# Altium PCB FPGA_Interface_BRD.PcbDoc (part 1 of 2)
Units mm, origin at the board's own origin, x right, y up, seen from the top; angles counter-clockwise.
Board outline 100 x 93 mm, 4 copper layers (L1, L2, L3, L4), stack 1.57 mm thick; 92 components, 85 nets, 379 pads, 103 vias.
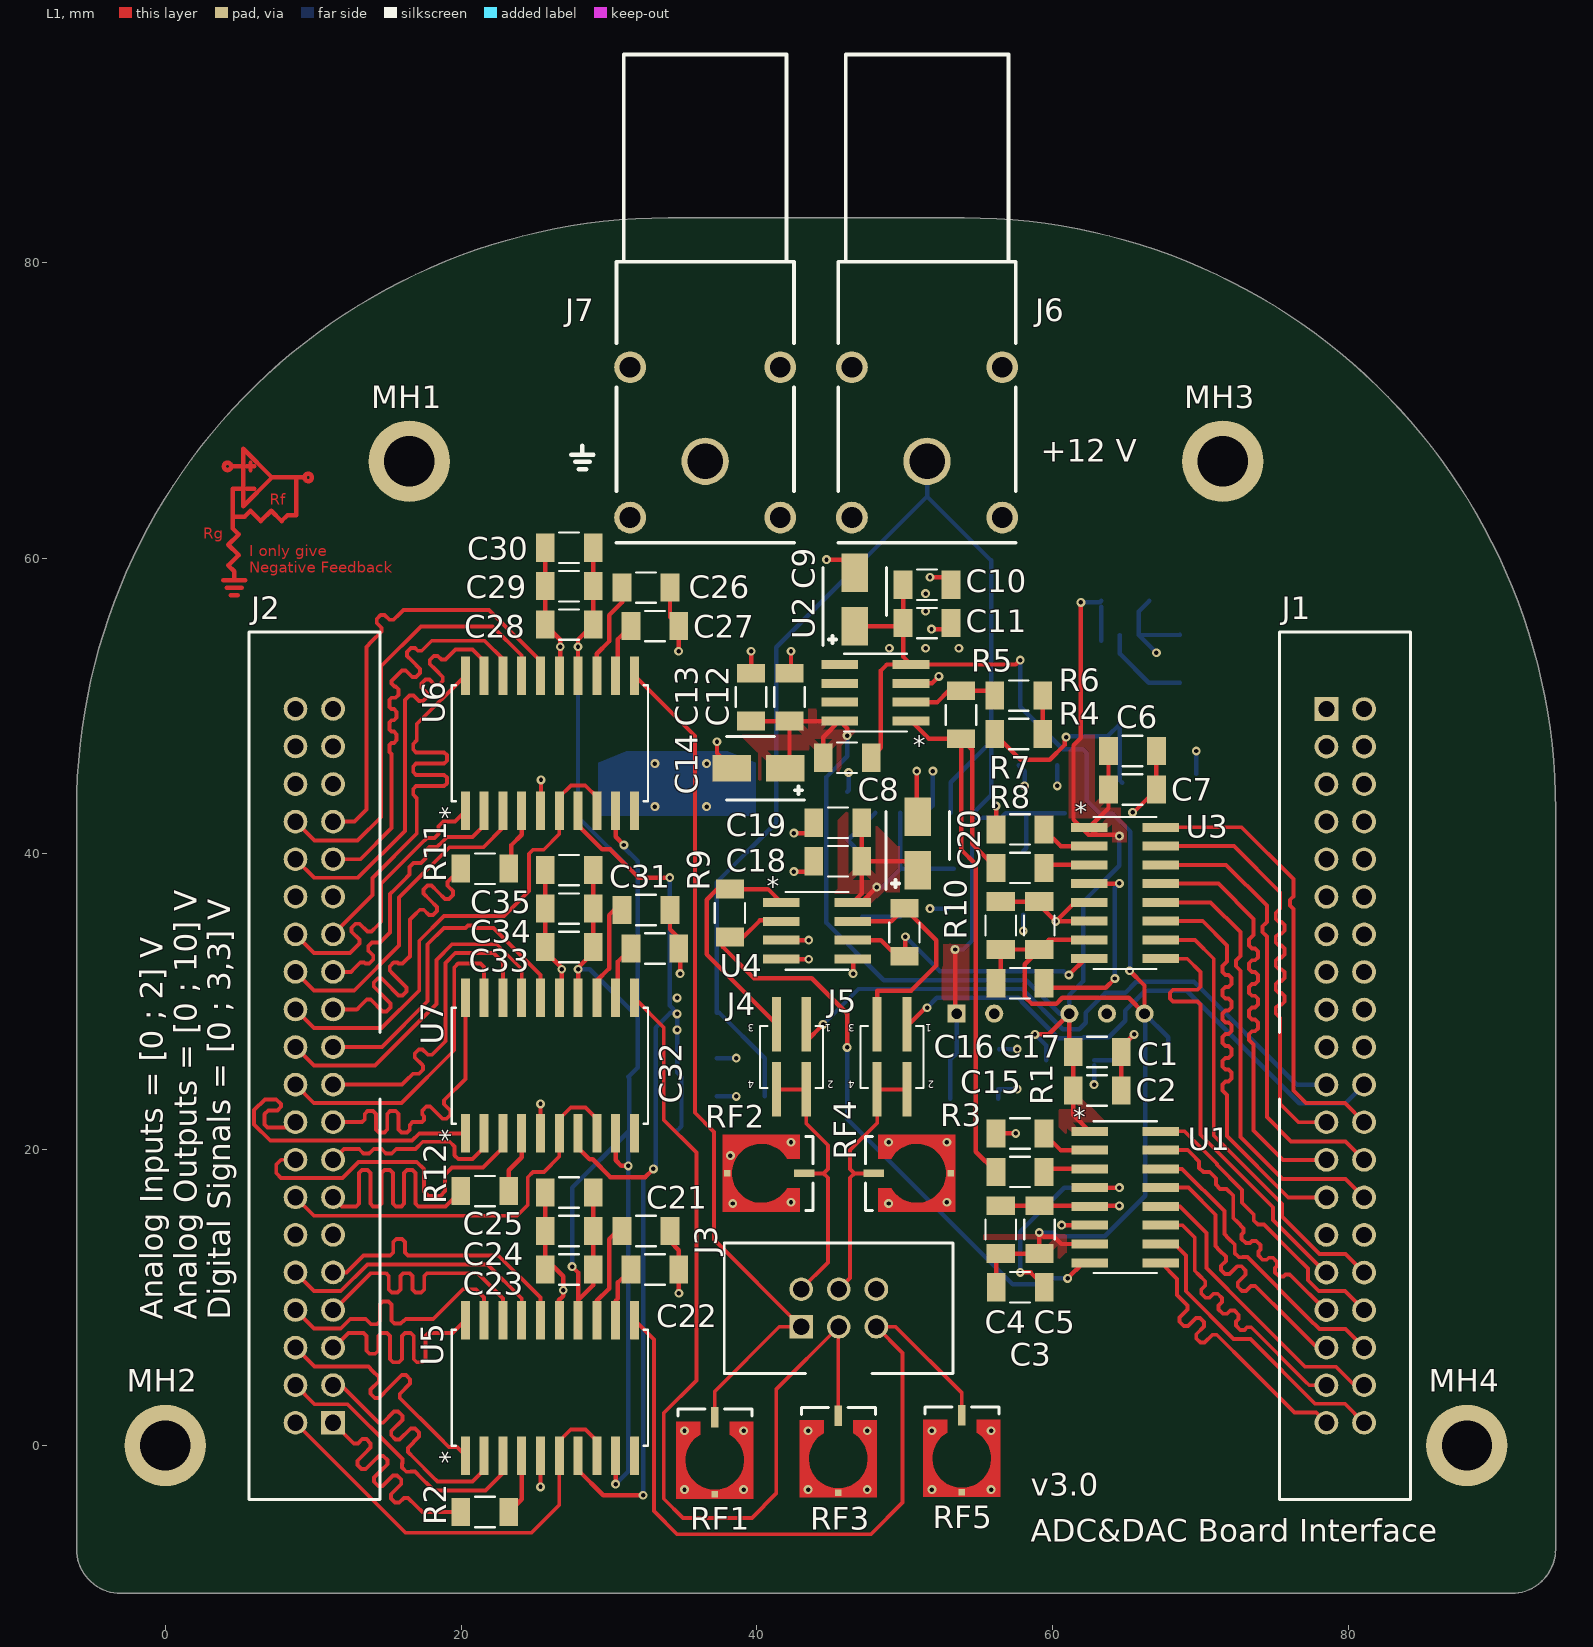
[diagram p0: L1 view]
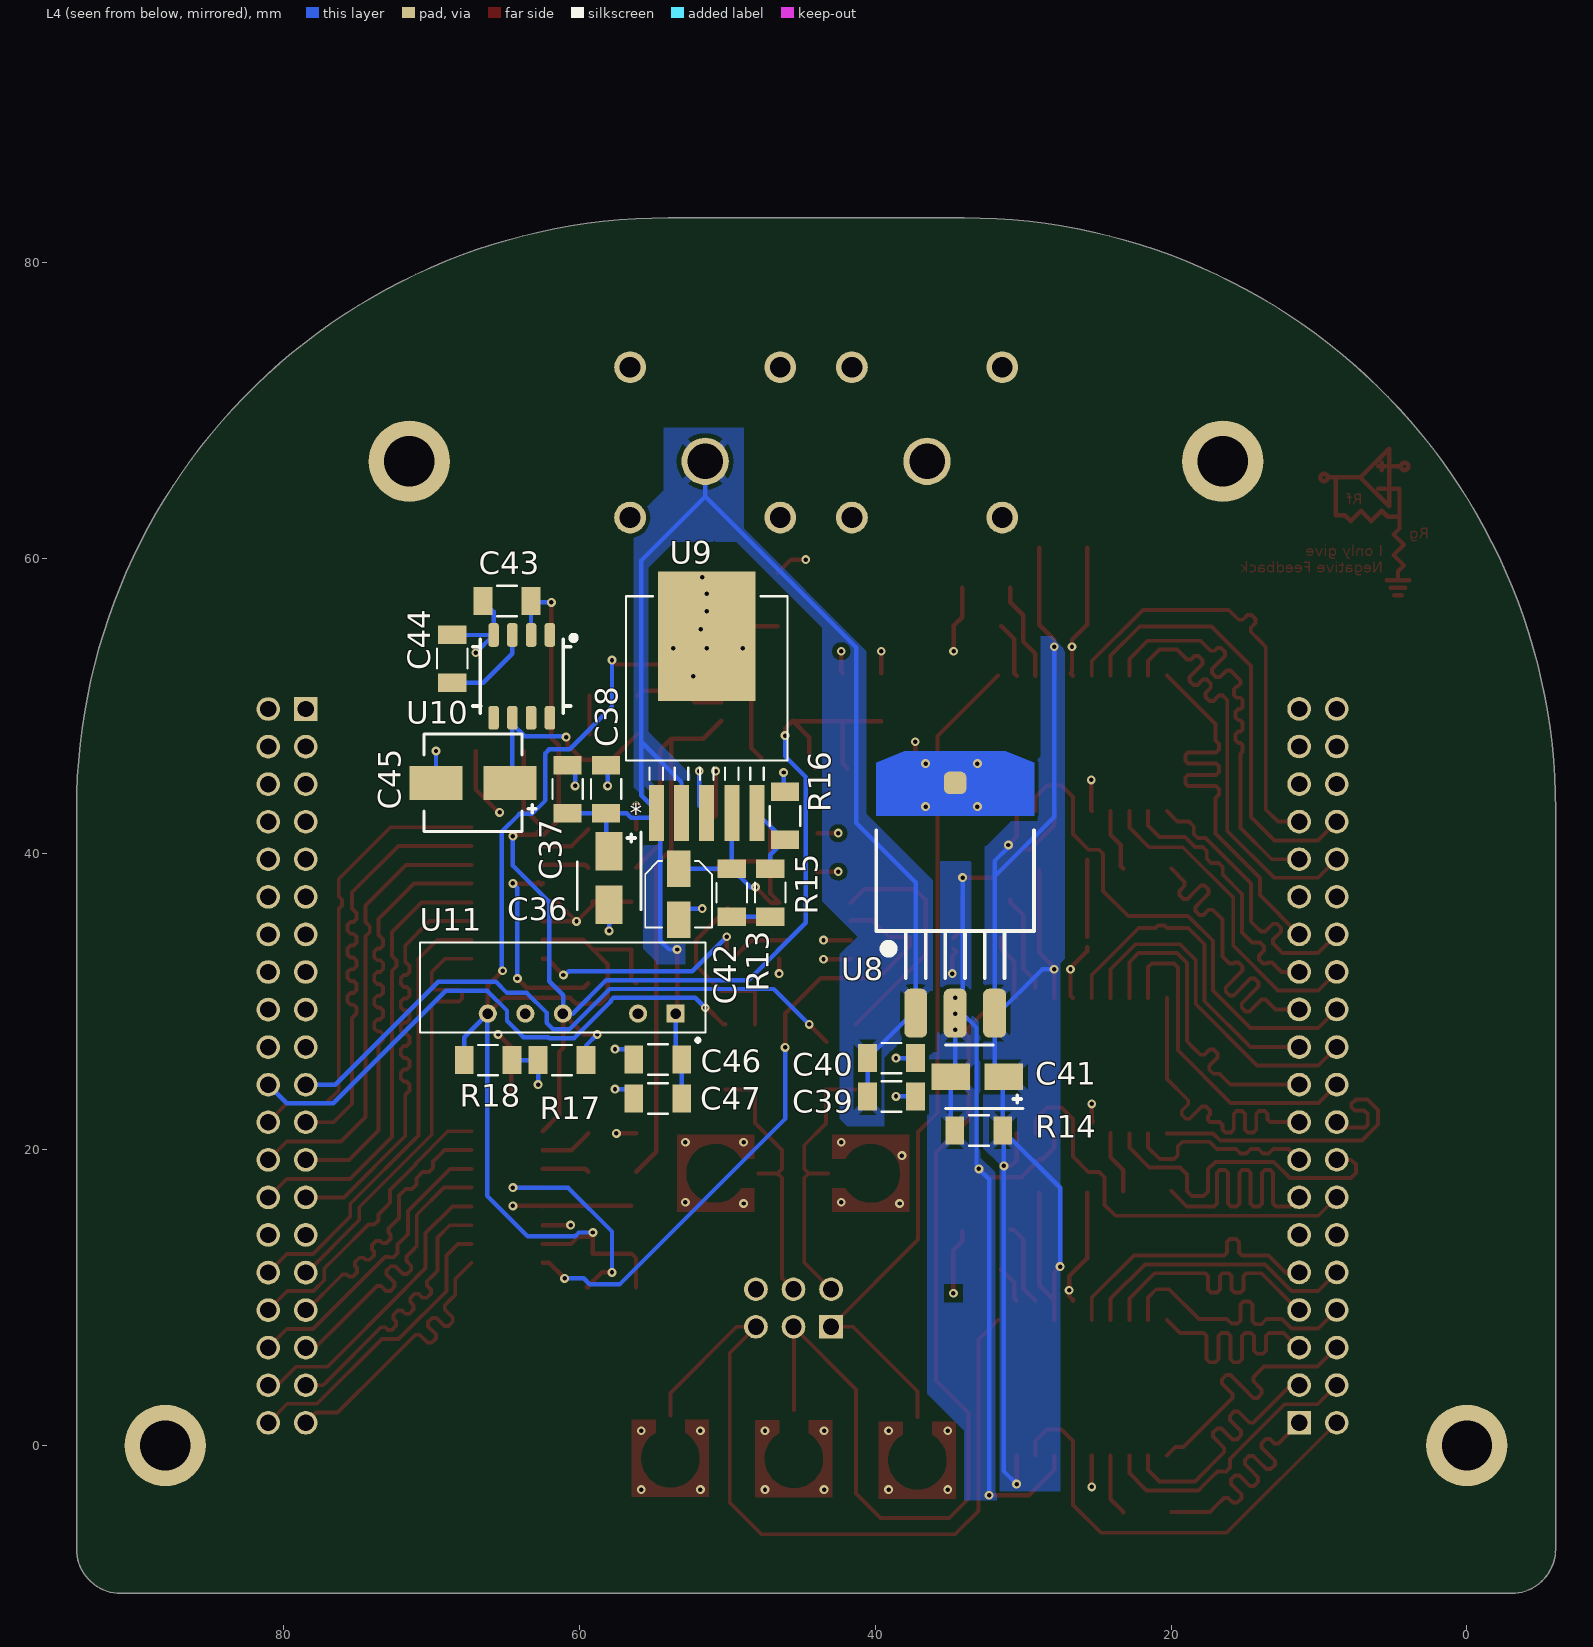
[diagram p1: L4 view, seen from below]
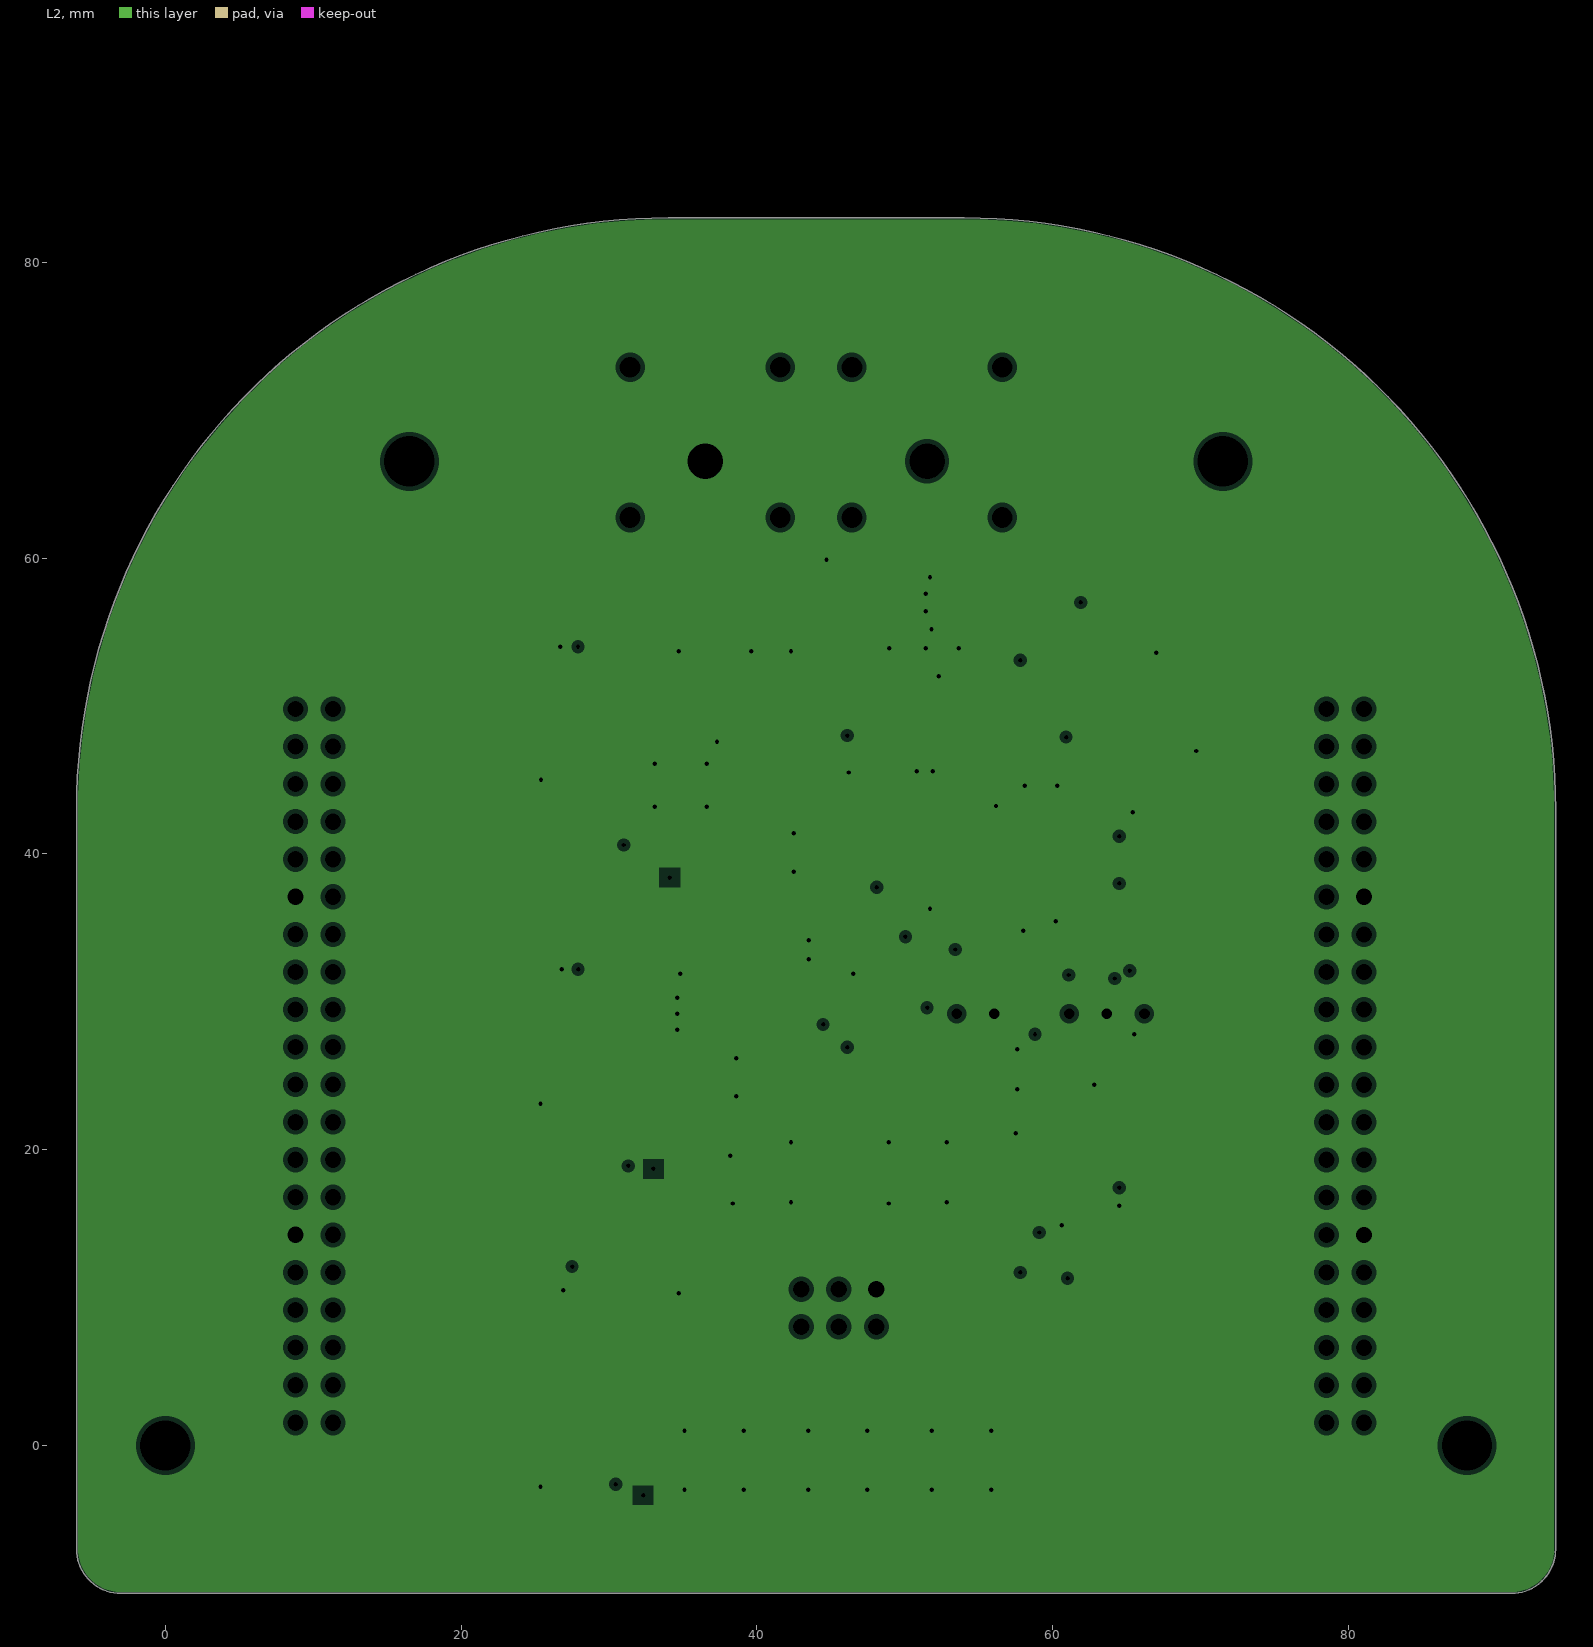
[diagram p2: L2, clearances drawn from the general rule]
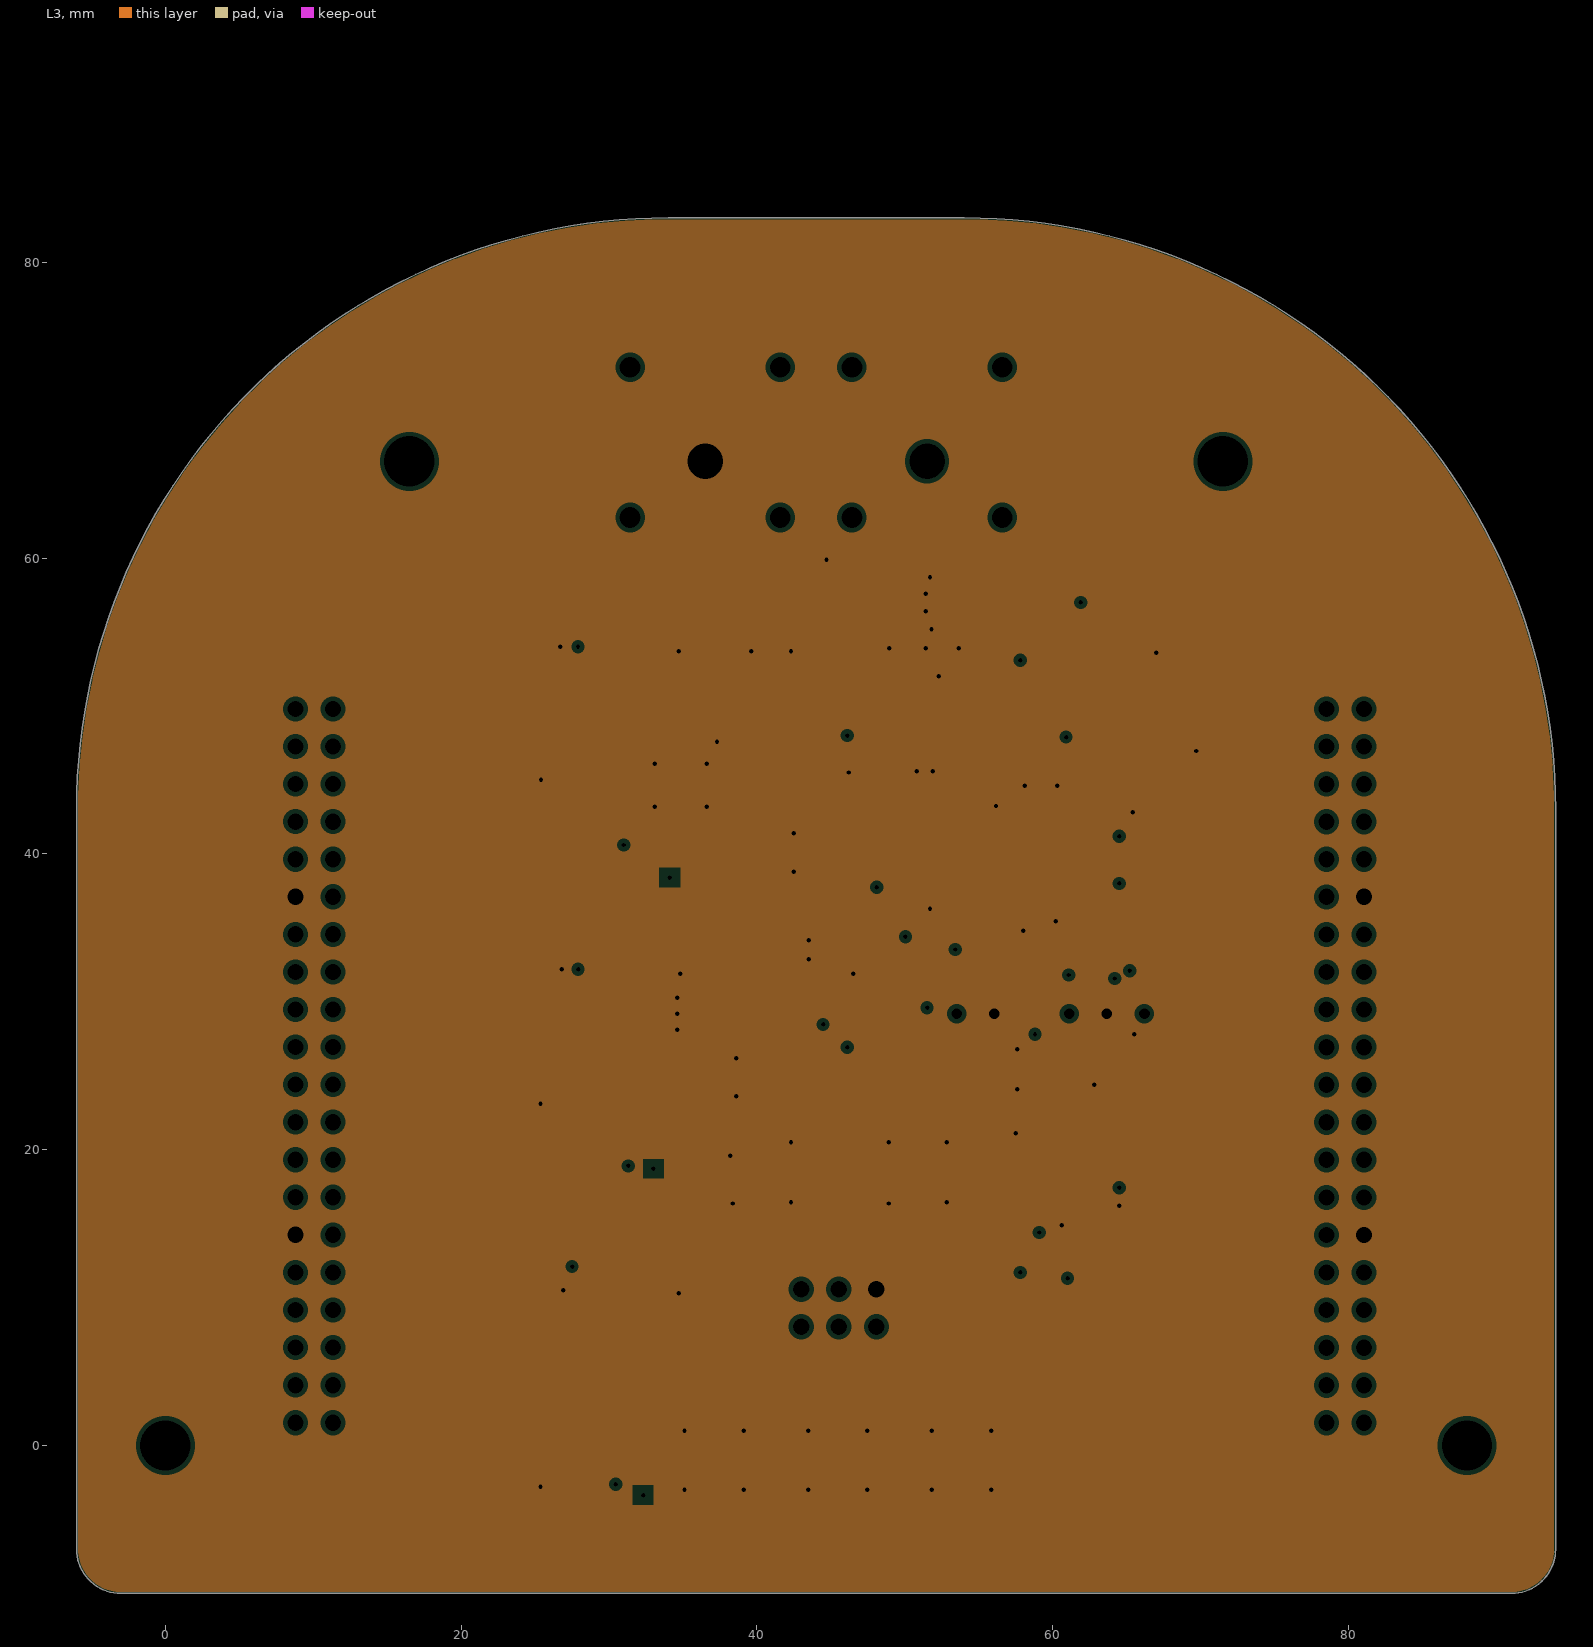
[diagram p3: L3, clearances drawn from the general rule]

## Layer stack, top to bottom
Top Solder: solder mask 0.015, Solder Resist, Dk 3.8
L1: signal copper 0.035
D1: prepreg 0.2, 7628, Dk 4.6
L2: plane copper 0.0175, net GND
D2: core 1.065, FR-4, Dk 4.5
L3: plane copper 0.0175, net GND
D3: prepreg 0.2, 7628, Dk 4.6
L4: signal copper 0.035
Bottom Solder: solder mask 0.015, Solder Resist, Dk 3.8

## Board outline
-6,-7 ccw(c-3,-7) -3,-10 91,-10 ccw(c91,-7) 94,-7 94,43 ccw(c54,43) 54,83 34,83 ccw(c34,43) -6,43
cut-out: -21,3

## Design rules (kind name [scope] priority, off if disabled: settings)
BoardOutlineClearance [All] p1: gap=0.4 ignorepadtopadclearanceinfootprint=FALSE
Clearance [All] p1: gap=0.3 ignorepadtopadclearanceinfootprint=FALSE
DiffPairsRouting [All] p1: maxlimit=0.6 minlimit=0.3 mostfreqgap=0.3 toplayer_minwidth=0.3 toplayer_maxwidth=1 toplayer_prefwidth=0.5 bottomlayer_minwidth=0.3 bottomlayer_maxwidth=1 bottomlayer_prefwidth=0.5 maxuncoupledlength=12.7
HoleSize [All] p1: absolutevalues=TRUE maxlimit=6 minlimit=0.3 maxpercent=80.000 minpercent=20.000
HoleToHoleClearance [All] p1: gap=0.2 allowstackedmicrovias=TRUE
MatchedLengths [InNetClass('ADC(1)') AND InNetClass('ADC(2)') AND InNetClass('ADC(3)') AND InNetClass('DAC(1)') AND InNetClass('DAC(2)')] p1: tolerance=0.254 checknetsindiffpair=FALSE checkdiffpairvsdiffpair=TRUE checkxsignals=TRUE checkothers=TRUE
MinimumAnnularRing [All] p1: minimumring=0.1
MinimumSolderMaskSliver [All] p1: minsoldermaskwidth=0.2
ParallelSegment [All] p1: limit=254 gap=0.3
PlaneClearance [All] p1: clearance=0.3
PlaneConnect [All] p1: pad.planeconnectstyle=Relief pad.reliefexpansion=0.5 pad.reliefentries=4 pad.reliefconductorwidth=0.5 pad.reliefairgap=0.3 via.planeconnectstyle=Direct via.reliefexpansion=0.508 via.reliefentries=4 via.reliefconductorwidth=1 via.reliefairgap=0.254
PolygonConnect [All] p1: thpad.connectstyle=Relief thpad.reliefconductorwidth=0.5 thpad.reliefentries=4 thpad.polygonreliefangle="45 Angle" thpad.airgapwidth=0.3 smdpad.connectstyle=Relief smdpad.reliefconductorwidth=0.5 smdpad.reliefentries=4 smdpad.polygonreliefangle="45 Angle" smdpad.airgapwidth=0.3 via.connectstyle=Direct via.reliefconductorwidth=0.5 via.reliefentries=4 via.polygonreliefangle="45 Angle" via.airgapwidth=0.3
RoutingVias [All] p1: holewidth=0.3 width=0.6 viastyle="Through Hole" minholewidth=0.3 minwidth=0.6 maxholewidth=0.3 maxwidth=0.6
SilkToSilkClearance [All] p1: silktosilkclearance=0.2
SilkToSolderMaskClearance [IsPad] p1: minsilkscreentomaskgap=0.2 clearancetoexposedcopper=TRUE
SolderMaskExpansion [All] p1: expansion=0.102
Width Zo [InNetClass('ADC(1)') OR InNetClass('ADC(2)') OR InNetClass('ADC(3)') OR InNetClass('DAC(1)') OR InNetClass('DAC(2)') OR InNet('Vo (A1)') OR InNet('Vo (A2)') OR InNet('Vin(ADC-1)') OR InNet('Vin(ADC-2)') OR InNet('Vin(ADC-3)')] p1: maxlimit=0.262 minlimit=0.262 preferedwidth=0.262 impedancedriven=TRUE minimp=50.000000 maximp=50.000000 favimp=50.000000
Width [All] p2: maxlimit=1.5 minlimit=0.2 preferedwidth=0.3
22 further rules are at their usual default settings.

## Classes and differential pairs
component class "[07] - Power_Stage": C36 C37 C38 C39 C40 C41 C42 C43 C44 C45 C46 C47 J6 J7 R13 R14 R15 R16 R17 R18 U8 U9 U10 U11
component class "[06] - ADC": C21 C22 C23 C24 C25 C26 C27 C28 C29 C30 C31 C32 C33 C34 C35 R2 R11 R12 U5 U6 U7
component class "[05] - DAC": C1 C2 C3 C4 C5 C6 C7 C8 C9 C10 C11 C12 C13 C14 C15 C16 C17 C18 C19 C20 R1 R3 R4 R5 R6 R7 R8 R9 R10 U1 U2 U3 U4
component class "[04] - CONNECTORS_2": J4 J5
component class "[03] - CONNECTORS_1": J1 J2 J3 MH1 MH2 MH3 MH4 RF1 RF2 RF3 RF4 RF5
net class ADC(3): o_CONVST_ADC_3 o_DB0_ADC_3 o_DB1_ADC_3 o_DB2_ADC_3 o_DB3_ADC_3 o_DB4_ADC_3 o_DB5_ADC_3 o_DB6_ADC_3 o_DB7_ADC_3 o_EOC_ADC_3
net class DAC(2): o_DB1_DAC_2 o_DB2_DAC_2 o_DB3_DAC_2 o_DB4_DAC_2 o_DB5_DAC_2 o_DB6_DAC_2 o_DB7_DAC_2 o_DB8_DAC_2
net class DAC(1): o_DB1_DAC_1 o_DB2_DAC_1 o_DB3_DAC_1 o_DB4_DAC_1 o_DB5_DAC_1 o_DB6_DAC_1 o_DB7_DAC_1 o_DB8_DAC_1
net class ADC(2): o_CONVST_ADC_2 o_DB0_ADC_2 o_DB1_ADC_2 o_DB2_ADC_2 o_DB3_ADC_2 o_DB4_ADC_2 o_DB5_ADC_2 o_DB6_ADC_2 o_DB7_ADC_2 o_EOC_ADC_2
net class ADC(1): o_CONVST_ADC_1 o_DB0_ADC_1 o_DB1_ADC_1 o_DB2_ADC_1 o_DB3_ADC_1 o_DB4_ADC_1 o_DB5_ADC_1 o_DB6_ADC_1 o_DB7_ADC_1 o_EOC_ADC_1

## Components (designator, comment, footprint, x,y, rotation, side; value= is the part's Value field where it differs from the comment)
C1 "0,1 uF" "1206 [Métrica 3216]" 63,26.6 r0 top
C2 "470 pF" "1206 [Métrica 3216]" 63,24 r0 top
C3 "0,01 uF" "1206 [Métrica 3216]" 57.8,10.7 r180 top
C4 "0,1 uF" "1206 [Métrica 3216]" 56.488,14.6 r90 top
C5 "470 pF" "1206 [Métrica 3216]" 59.1,14.6 r90 top
C6 "0,1 uF" "1206 [Métrica 3216]" 65.388,46.955 r0 top
C7 "470 pF" "1206 [Métrica 3216]" 65.388,44.355 r0 top
C8 "0,1 uF" "1206 [Métrica 3216]" 46.1,46.5 r180 top
C9 "10 uF" EEE1VA100WR 46.6,57.2 r90 top
C10 "0,1 uF" "1206 [Métrica 3216]" 51.5,58.2 r0 top
C11 "470 pF" "1206 [Métrica 3216]" 51.5,55.6 r0 top
C12 "470 pF" "1206 [Métrica 3216]" 42.2,50.6 r90 top
C13 "0,1 uF" "1206 [Métrica 3216]" 39.6,50.6 r90 top
C14 "10 uF" EEE1VA100WR 40.1,45.8 r180 top
C15 "0,01 uF" "1206 [Métrica 3216]" 57.788,31.255 r180 top
C16 "0,1 uF" "1206 [Métrica 3216]" 56.488,35.155 r90 top
C17 "470 pF" "1206 [Métrica 3216]" 59.088,35.155 r90 top
C18 "470 pF" "1206 [Métrica 3216]" 45.468,39.5 r180 top
C19 "0,1 uF" "1206 [Métrica 3216]" 45.468,42.1 r180 top
C20 "10 uF" EEE1VA100WR 50.868,40.7 r90 top
C21 "0,1 uF" "1206 [Métrica 3216]" 32.5,14.5 r0 top
C22 "0,1 uF" "1206 [Métrica 3216]" 33.1,11.9 r0 top
C23 "470 pF" "1206 [Métrica 3216]" 27.3,11.9 r180 top
C24 "0,1 uF" "1206 [Métrica 3216]" 27.3,14.5 r180 top
C25 "1 uF" "1206 [Métrica 3216]" 27.3,17.1 r180 top
C26 "0,1 uF" "1206 [Métrica 3216]" 32.5,58 r0 top
C27 "0,1 uF" "1206 [Métrica 3216]" 33.1,55.4 r0 top
C28 "470 pF" "1206 [Métrica 3216]" 27.3,55.5 r180 top
C29 "0,1 uF" "1206 [Métrica 3216]" 27.3,58.1 r180 top
C30 "1 uF" "1206 [Métrica 3216]" 27.3,60.7 r180 top
C31 "0,1 uF" "1206 [Métrica 3216]" 32.5,36.2 r0 top
C32 "0,1 uF" "1206 [Métrica 3216]" 33.1,33.6 r0 top
C33 "470 pF" "1206 [Métrica 3216]" 27.3,33.7 r180 top
C34 "0,1 uF" "1206 [Métrica 3216]" 27.3,36.3 r180 top
C35 "1 uF" "1206 [Métrica 3216]" 27.3,38.9 r180 top
C36 "10 uF" EEE1VA100WR 58,38.371 r270 bottom
C37 "0,1 uF" "1206 [Métrica 3216]" 60.8,44.371 r90 bottom
C38 "470 pF" "1206 [Métrica 3216]" 58.2,44.371 r90 bottom
C39 "0,1 uF" "1206 [Métrica 3216]" 38.9,23.6 r180 bottom
C40 "470 pF" "1206 [Métrica 3216]" 38.9,26.19 r180 bottom
C41 "10 uF" EEE1VA100WR 33.1,24.92 r0 bottom
C42 "22 uF" EEE1VA220WR 53.3,37.271 r270 bottom
C43 "1 uF" "1206 [Métrica 3216]" 64.9,57.1 r0 bottom
C44 "0,1 uF" "1206 [Métrica 3216]" 68.6,53.2 r90 bottom
C45 "100 uF" EEE-1VA101XP 67.2,44.8 r270 bottom
C46 "0,1 uF" "1206 [Métrica 3216]" 54.7,26.102 r0 bottom
C47 "470 pF" "1206 [Métrica 3216]" 54.7,23.457 r0 bottom
J1 "IDC Connector_40p" "IDC CONNECTOR - 40 PINS" 78.504,49.794 r270 top
J2 "IDC Connector_40p" "IDC CONNECTOR - 40 PINS" 11.34,1.54 r90 top
J3 "IDC Connector_6p" "IDC CONNECTOR - 6 PINS" 42.99,8.025 r0 top
J4 "TMM-102-01-G-D00 (2 connectors)" "TMM-102-01-G-D00 (2 CONNECTORS)" 43.332,26.271 r180 top value=Value
J5 "TMM-102-01-G-D00 (2 connectors)" "TMM-102-01-G-D00 (2 CONNECTORS)" 50.132,26.271 r180 top value=Value
J6 "RED Banana connector" "Banana Connector" 51.5,66.54 r270 top
J7 "BLACK Banana connector" "Banana Connector" 36.5,66.54 r270 top
MH1 "MH_5.5MMC_3MMD" MH_5.5MMC_3MMD 16.5,66.54 r0 top
MH2 "MH_5.5MMC_3MMD" MH_5.5MMC_3MMD 0,0 r0 top
MH3 "MH_5.5MMC_3MMD" MH_5.5MMC_3MMD 71.5,66.54 r0 top
MH4 "MH_5.5MMC_3MMD" MH_5.5MMC_3MMD 88,0 r0 top
R1 "100" "1206 [Métrica 3216]" 57.782,21.1 r0 top
R2 "1 %" "1206 [Métrica 3216]" 21.6,-4.5 r180 top value=1K
R3 "100" "1206 [Métrica 3216]" 57.782,18.5 r0 top
R4 "24k9" "1206 [Métrica 3216]" 57.7,48.1 r0 top
R5 "1k" "1206 [Métrica 3216]" 53.8,49.4 r270 top
R6 "100" "1206 [Métrica 3216]" 57.7,50.7 r180 top
R7 "100" "1206 [Métrica 3216]" 57.788,41.655 r0 top
R8 "100" "1206 [Métrica 3216]" 57.788,39.055 r0 top
R9 "10k" "1206 [Métrica 3216]" 38.168,36 r90 top
R10 "10k" "1206 [Métrica 3216]" 49.968,34.7 r90 top
R11 "1 %" "1206 [Métrica 3216]" 21.6,39 r180 top value=1K
R12 "1 %" "1206 [Métrica 3216]" 21.6,17.2 r180 top value=1K
R13 "5k9" "1206 [Métrica 3216]" 49.7,37.371 r270 bottom
R14 "430" "1206 [Métrica 3216]" 33,21.3 r0 bottom
R15 "75" "1206 [Métrica 3216]" 47.1,37.376 r90 bottom
R16 "200" "1206 [Métrica 3216]" 46.1,42.571 r90 bottom
R17 "220" "1206 [Métrica 3216]" 61.179,26.057 r0 bottom
R18 "220" "1206 [Métrica 3216]" 66.179,26.057 r0 bottom
RF1 "85305-0232" ROS-19S101-40ML5_V 37.15,-0.994 r180 top
RF2 "85305-0232" ROS-19S101-40ML5_V 40.3,18.4 r90 top
RF3 "85305-0232" ROS-19S101-40ML5_V 45.5,-0.894 r180 top
RF4 "85305-0232" ROS-19S101-40ML5_V 50.8,18.4 r270 top
RF5 "85305-0232" ROS-19S101-40ML5_V 53.85,-0.863 r180 top
U1 "DAC08ESZ" DAC08ESZ_(R_16-M) 64.9,16.8 r0 top value=Value
U2 "AD8028ARZ" "AD8028ARZ - (R_8-M)" 48,50.9 r180 top value=Value
U3 "DAC08ESZ" DAC08ESZ_(R_16-M) 64.888,37.355 r0 top value=Value
U4 "AD8028ARZ" "AD8028ARZ - (R_8-M)" 44.068,34.8 r0 top value=Value
U5 "AD7822BR" "RW_20-M (AD7822BR)" 26,3.9 r90 top value=Value
U6 "AD7822BR" "RW_20-M (AD7822BR)" 26,47.478 r90 top value=Value
U7 "AD7822BR" "RW_20-M (AD7822BR)" 26,25.678 r90 top value=Value
U8 "MIC29300-3.3WU" MIC29300 34.6,27.587 r180 bottom
U9 "MIC29152WU" MIC29152WU 51.4,51.871 r180 bottom value=Value
U10 "AD780ARZ" AD780ARZ 62,55.1 r0 bottom
U11 "IA1205S" IA0305S 53.5,29.2 r0 bottom value=Value

## Footprints (in the part's own frame and the unit in brackets; to place one, negate y for a bottom-side part, rotate by r counter-clockwise, add the part's x,y. Pads: shape width x height; smd on the part's side, far side on the other; paste and mask are expansions set on the pad)
"1206 [Métrica 3216]" [mm]
  rect 1.261x1.903 smd paste+0 mask+0: 1(-1.621,0) 2(1.621,0)
  silkscreen extent -0.67,-1.03 0.67,1.03, body extent -1.7,-0.9 1.7,0.9, height 1.7
AD780ARZ [mm] "Voltage Regulator from +10 V to +2.5 V"
  rrect50% 0.71x1.6 smd: 1(0,0.3) 2(1.27,0.3) 3(2.54,0.3) 4(3.81,0.3) 5(3.81,5.9) 6(2.54,5.9) 7(1.27,5.9) 8(0,5.9)
  silkscreen extent -1.7,0.4 5.2,5.6, body extent -0.6,0 4.4,6.2, height 1.75
"AD8028ARZ - (R_8-M)" [mm] "SOIC, 8 Pines"
  rect 2.473x0.608 smd paste+0 mask+0: 1(-2.412,1.905) 2(-2.412,0.635) 3(-2.412,-0.635) 4(-2.412,-1.905) 5(2.412,-1.905) 6(2.412,-0.635) 7(2.412,0.635) 8(2.412,1.905)
  silkscreen extent -2.12,-2.63 2.12,2.63, body extent -3.1,-2.5 3.1,2.5, height 1.76
"Banana Connector" [mm] "Bannana Connector (1 KV and 24 A)"
  round 3.2 hole 2.4: 1(0,0)
  round 2.15 hole 1.4: 2(3.8,5.08) 3(-6.36,5.08) 4(-6.36,-5.08) 5(3.8,-5.08)
  silkscreen extent -27.5,-6 5.5,6, body extent -27.5,-6 5.5,6, height 11.5
DAC08ESZ_(R_16-M) [mm] "DAC footprint"
  rect 2.473x0.608 smd paste+0 mask+0: 1(-2.412,4.445) 2(-2.412,3.175) 3(-2.412,1.905) 4(-2.412,0.635) 5(-2.412,-0.635) 6(-2.412,-1.905) 7(-2.412,-3.175) 8(-2.412,-4.445) 9(2.412,-4.445) 10(2.412,-3.175) 11(2.412,-1.905) 12(2.412,-0.635) 13(2.412,0.635) 14(2.412,1.905) 15(2.412,3.175) 16(2.412,4.445)
  silkscreen extent -2.13,-5.13 2.13,5.13, body extent -3.1,-5 3.1,5, height 1.76
EEE1VA100WR [mm] "EEE1VA100WR -  Condensador Electrolítico Aluminio SMD, Radial - SMD, 10 µF, 35 V, S Series, 1000 horas a 85°C"
  rect 2.6x1.8 smd: 1(-1.8,0) 2(1.8,0)
  silkscreen extent -3.1,-2.15 2.15,2.15, body extent -2.3,-2.25 2.3,2.25, height 5.5
EEE1VA220WR [mm] "EEE1VA220WR -  Condensador Electrolítico Aluminio SMD, Radial - SMD, 22 µF, 35 V, Serie S, 1000 horas a 85°C"
  rect 2.46x1.58 smd: 1(-1.725,0) 2(1.725,0)
  silkscreen extent -2.25,-2.25 2.25,2.25, body extent -2.3,-2.15 2.3,2.15, height 5.5
EEE-1VA101XP [mm] "EEE1VA101XP -  Condensador Electrolítico Aluminio SMD, Radial - SMD, 100 µF, 35 V, Serie S, 2000 horas a 85°C"
  rect 2.3x3.6 smd: 1(0,2.5) 2(0,-2.5)
  silkscreen extent -3.3,-3.3 3.3,4.25, body extent -3.4,-3.6 3.4,3.6, height 7.98
IA0305S [mm] "IA1205S -  Convertidor DC/DC Aislado de Montaje en Placa, Orificio Pasante, 1W, 5V, 100mA, -5V, 100mA"
  rect 1.228x1.228 hole 0.72: 1(0,0)
  round 1.228 hole 0.72: 2(2.54,0) 3(7.62,0) 4(10.16,0) 5(12.7,0)
  silkscreen extent -2.03,-4.82 17.27,1.92, body extent -2.03,-4.82 17.27,1.28, height 10.16
"IDC CONNECTOR - 6 PINS" [mm]
  rect 1.6x1.6 hole 1.1: 1(0,0)
  round 1.6 hole 1.1: 2(0,2.54) 3(2.54,0) 4(2.54,2.54) 5(5.08,0) 6(5.08,2.54)
  silkscreen extent -5.2,-3.17 10.28,5.68, body extent -5.2,-3.17 10.28,5.68, height 8.85
"IDC CONNECTOR - 40 PINS" [mm]
  rect 1.6x1.6 hole 1.1: 1(0,0)
  round 1.6 hole 1.1: 2(0,2.54) 3(2.54,0) 4(2.54,2.54) 5(5.08,0) 6(5.08,2.54) 7(7.62,0) 8(7.62,2.54) 9(10.16,0) 10(10.16,2.54) 11(12.7,0) 12(12.7,2.54) 13(15.24,0) 14(15.24,2.54) 15(17.78,0) 16(17.78,2.54) 17(20.32,0) 18(20.32,2.54) 19(22.86,0) 20(22.86,2.54) 21(25.4,0) 22(25.4,2.54) 23(27.94,0) 24(27.94,2.54) 25(30.48,0) 26(30.48,2.54) 27(33.02,0) 28(33.02,2.54) 29(35.56,0) 30(35.56,2.54) 31(38.1,0) 32(38.1,2.54) 33(40.64,0) 34(40.64,2.54) 35(43.18,0) 36(43.18,2.54) 37(45.72,0) 38(45.72,2.54) 39(48.26,0) 40(48.26,2.54)
  silkscreen extent -5.2,-3.17 53.46,5.68, body extent -5.2,-3.17 53.46,5.68, height 8.85
MH_5.5MMC_3MMD [mm] "Mounting Hole 5,5 mm Diameter, 3 mm Drill; 30 mm body length"
  round 5.5 hole 3.4: 1(0,0)
MIC29152WU [mil] "TO-263-5-M"
  rect 39.94x149.37 smd paste+0 mask+0: 1(-134,-358.47) 2(-67,-358.47) 3(0,-358.47) 4(67,-358.47) 5(134,-358.47)
  rect 260x345 smd paste+0 mask+0: 3(0,112)
  silkscreen extent -215,-270 215,219, body extent -210,-411 210,254, height 181
MIC29300 [mil] "Voltage Regulator from +10 V to +3.3 V"
  rrect50% 60.87x129.69 smd: 1(-105,64.84) 2(0,64.84) 3(105,64.84)
  rrect50% 60x60 smd: 2(0,677.66)
  L1 region: -210,590.55 -210,644.68 -209.95,731.3 -134.97,761.59 135,761.59 210,731.3 210,644.68 209.98,644.66 210,590.55
  silkscreen extent -210,157 210,551, body extent -210,20 210,711, height 181
ROS-19S101-40ML5_V [mm] "SMP Straight Plug Limited Detent, Small, 6x5x4.1mm, Rosenberger Recommended"
  rect 0.5x1.4 smd: 1(0,-2.9)
  rect 0.45x0.45 smd: MP(0,2.305)
  L1 region: -2.6,-2.6 -2.6,2.6 2.6,2.6 2.6,-2.6 1,-2.6 1,-1.732 1.732,-1 2,0 1.732,1 1,1.732 0,2 -1,1.732 -1.732,1 -2,0 -1.732,-1 -1,-1.732 -1,-1.732 -1,-2.6
  silkscreen extent -2.5,-3.47 2.5,-3, body extent -2.5,-3.47 2.5,2.5, height 4.1
"RW_20-M (AD7822BR)" [mil] "ADC"
  rect 102.5x24 smd paste+0 mask+0: 1(-180.25,225) 2(-180.25,175) 3(-180.25,125) 4(-180.25,75) 5(-180.25,25) 6(-180.25,-25) 7(-180.25,-75) 8(-180.25,-125) 9(-180.25,-175) 10(-180.25,-225) 11(180.25,-225) 12(180.25,-175) 13(180.25,-125) 14(180.25,-75) 15(180.25,-25) 16(180.25,25) 17(180.25,75) 18(180.25,125) 19(180.25,175) 20(180.25,225)
  silkscreen extent -155,-261 155,261, body extent -209,-256 209,256, height 104
"TMM-102-01-G-D00 (2 CONNECTORS)" [mil] "TMM-102-01-L-D-SM -  Conector de Placa a Placa, 2 mm, 4 Contactos, Header, TMM Series, Montaje Superficial, 2 Filas"
  rect 24x145 smd paste+0 mask+0: 1(0,-86.5) 2(0,86.5) 3(78.74,-86.5) 4(78.74,86.5)
  silkscreen extent -44,-82 123,83, body extent -39,-149 118,149, height 235

## Part data
C1 C4 C6 C8 C10 C13 C16 C19 C21 C22 C24 C26 C27 C29 C31 C32 C34 C37 C39 C44 C46: library part C0,1uF, "VJ1206Y104KXXCW1BC -  Condensador de Cerámica Multicapa, 0.1 µF, 25 V, 1206 [Métrica 3216], ± 10%, X7R, VJ Series", Voltage="25 V", ComponentLink1Description="Farnell Webpage", ComponentLink1URL=https://es.farnell.com/vishay/vj1206y104kxxcw1bc/conden-0-1-f-25v-10-x7r-1206/dp/2896645
C2 C5 C7 C11 C12 C17 C18 C23 C28 C33 C38 C40 C47: library part C470pF, "VJ1206A471JXACW1BC -  Condensador de Cerámica Multicapa, 470 pF, 50 V, 1206 [Métrica 3216], ± 5%, C0G / NP0, VJ Series", Voltage="50 V", ComponentLink1Description="Farnell Webpage", ComponentLink1URL=https://es.farnell.com/vishay/vj1206a471jxacw1bc/conden-470pf-50v-5-c0g-np0-1206/dp/2896616
C3 C15: library part C0,01uF, "MCSH31B103K250CT -  Condensador de Cerámica Multicapa, 10000 pF, 25 V, 1206 [Métrica 3216], ± 10%, X7R, Serie MCSH", Voltage="25 V", ComponentLink1Description="Farnell Webpage", ComponentLink1URL=https://es.farnell.com/multicomp/mcsh31b103k250ct/conden-0-01-f-25v-10-x7r-1206/dp/1856586
C9 C14 C20 C36 C41: library part C10uF, "EEE1VA100WR -  Condensador Electrolítico Aluminio SMD, Radial - SMD, 10 µF, 35 V, S Series, 1000 horas a 85°C", Voltage="35 V", ComponentLink1Description="Farnell Webpage", ComponentLink1URL=https://es.farnell.com/panasonic/eee1va100wr/conden-10-f-35v-smd/dp/2808004?st=EEE1VA100WR
C25 C30 C35 C43: library part C1uF, "MC1206B105K500CT -  Condensador de Cerámica Multicapa, 1 µF, 50 V, 1206 [Métrica 3216], ± 10%, X7R, Serie MC", Voltage="50 V", ComponentLink1Description="Farnell Webpage", ComponentLink1URL=https://es.farnell.com/multicomp/mcsh31b105k500ct/conden-1-f-50v-10-x7r-1206/dp/1856643
C42: library part C22uF, "EEE1VA220WR -  Condensador Electrolítico Aluminio SMD, Radial - SMD, 22 µF, 35 V, Serie S, 1000 horas a 85°C", Voltage="35 V", ComponentLink1Description="Farnell Webpage", ComponentLink1URL=https://es.farnell.com/panasonic/eee1va220wr/conden-22-f-35v-radial-smd/dp/2326173?st=EEE1VA220WR
C45: library part C100uF, "EEE1VA101XP -  Condensador Electrolítico Aluminio SMD, Radial - SMD, 100 µF, 35 V, Serie S, 2000 horas a 85°C", Voltage="35 V", ComponentLink1Description="Farnell Webpage", ComponentLink1URL=https://es.farnell.com/panasonic/eee1va101xp/conden-100-f-35v-radial-smd/dp/2326172?st=EEE1VA101XP
J1 J2: "MC-254-40-00-ST-DIP -  Conector de Cable a Placa, 2.54 mm, 40 Contactos, Header, Agujero Pasante, 2 Filas", Manufacturer_Name="RS Components", Manufacturer_Part_Number=6257296, ComponentLink1Description="Farnell Webpage", ComponentLink1URL=https://es.farnell.com/multicomp/mc-254-40-00-st-dip/conector-macho-40pos-2fila-2-54mm/dp/2843536, Datasheet Link=https://componentsearchengine.com/Datasheets/3/6257296.pdf, Geometry.Height=8.9mm, RS Part Number=6257296
J3: "MC-254-06-00-ST-DIP -  Conector de Cable a Placa, 2.54 mm, 6 Contactos, Header, Agujero Pasante, 2 Filas", Manufacturer_Name="RS Components", Manufacturer_Part_Number=6257296, ComponentLink1Description="Farnell Webpage", ComponentLink1URL=https://es.farnell.com/multicomp/mc-254-06-00-st-dip/conector-macho-6pos-2fila-2-54mm/dp/2843525?ost=MC-254-06-00-ST-DIP&ddkey=https%3Aes-ES%2FElement14_Spain%2Fsearch, Datasheet Link=https://componentsearchengine.com/Datasheets/3/6257296.pdf, Geometry.Height=8.9mm, RS Part Number=6257296
J4 J5: "TMM-102-01-L-D-SM -  Conector de Placa a Placa, 2 mm, 4 Contactos, Header, TMM Series, Montaje Superficial, 2 Filas", Manufacturer_Part_Number=TMM-102-01-L-D-SM, Built_By=EMA_UL_Team, ComponentLink1Description="Farnell WebPage", ComponentLink1URL=https://es.farnell.com/samtec/tmm-102-01-l-d-sm/conector-macho-4pos-2fila-2mm/dp/2856897?scope=partnumberlookahead&ost=TMM-102-01-L-D-SM&searchref=searchlookahead&exaMfpn=true&ddkey=https%3Aes-ES%2FElement14_Spain%2Fw%2Fsearch, Copyright="Copyright (C) 2018 Accelerated Designs. All rights reserved", RefDes=RefDes, Type=DEV, Vendor="Samtec Inc"
J6 J7: "FCR7350R -  Conector Banana de Prueba, 4mm, Hembra, Montaje en PCB, 24 A, 1 kV, Contactos Chapados en Oro", ComponentLink1Description="Farnell Webpage"
  J6: ComponentLink1URL=https://es.farnell.com/cliff-electronic-components/fcr7350r/toma-pcb-4-mm-r-a-s16n-pc-rojo/dp/1854508
  J7: ComponentLink1URL=https://es.farnell.com/cliff-electronic-components/fcr7350b/toma-pcb-4-mm-r-a-s16n-pc-negro/dp/1854507
MH1 MH2 MH3 MH4: "Mounting Hole 5,5 mm Diameter, 3 mm Drill; 30 mm body length /  / 05.13.301 -  Separador, Galvanizado, Acero, M3, Hexagonal, Macho-Hembra, 30 mm, 05.13 Series", Manufacturer=Ettinger, Manufacturer Part Number=05.13.301, Supplier Part Number 1=1466817, ComponentLink1Description=http://www.farnell.com/datasheets/58394.pdf?src-supplier=Element14, ComponentLink1URL=http://www.farnell.com/datasheets/58394.pdf?src-supplier=Element14, Length=30mm, Material=Steel, Mount=External, Pricing 1="4=0.526, 50=0.504, 100=0.47 (EUR)", REACH SVHC="No SVHC", Stock 1=5518, Supplier 1=Farnell, Thread Size=M3
R1 R3 R6 R7 R8: library part R100, "MCWR12X1000FTL -  Resistencia SMD de Tipo Chip, Película Gruesa, 1206 [Métrica 3216], 100 ohm, Serie MCWR, 200 V", Tolerance="1 %", ComponentLink1Description="Farnell Webpage", ComponentLink1URL=https://es.farnell.com/multicomp/mcwr12x1000ftl/res-100r-1-0-25w-pel-c-gruesa/dp/2447454
R2 R11 R12: library part Res3, "MCWR12X1001FTL -  Resistencia SMD de Tipo Chip, Película Gruesa, 1206 [Métrica 3216], 1 kohm, Serie MCWR, 200 V", ComponentLink1Description="Farnell Webpage", ComponentLink1URL=https://es.farnell.com/multicomp/mcwr12x1001ftl/res-1k-1-0-25w-1206-pel-c-gruesa/dp/2447473, LatestRevisionDate=29-May-2009, LatestRevisionNote="IPC-7351 Footprint Added.", PackageDescription="Chip Resistor", PackageReference=J1-0603, Published=8-Jun-2000, Publisher="Altium Limited"
R4: library part R24k9, "MCWR12X2492FTL -  Resistencia SMD de Tipo Chip, 1206 [Métrica 3216], 24.9 kohm, MCWR12 Series, 200 V, Película Gruesa", Tolerance="1 %", ComponentLink1Description="Farnell Webpage", ComponentLink1URL=https://es.farnell.com/multicomp/mcwr12x2492ftl/res-24k9-1-0-25w-1206-pel-c-gruesa/dp/2695140
R5: library part R1k, "MCWR12X1001FTL -  Resistencia SMD de Tipo Chip, Película Gruesa, 1206 [Métrica 3216], 1 kohm, Serie MCWR, 200 V", Tolerance="1 %", ComponentLink1Description="Farnell Webpage", ComponentLink1URL=https://es.farnell.com/multicomp/mcwr12x1001ftl/res-1k-1-0-25w-1206-pel-c-gruesa/dp/2447473
R9 R10: library part R10k, "CRGCQ1206F10K -  Resistencia SMD de Tipo Chip, 1206 [Métrica 3216], 10 kohm, CRGCQ Series, 200 V, Película Gruesa", Tolerance="1 %", ComponentLink1Description="Farnell Webpage", ComponentLink1URL=https://es.farnell.com/te-connectivity/crgcq1206f10k/res-10k-1-1206-pel-c-gruesa/dp/2861595
R13: library part R5k9, "ERJ8ENF5901V -  Resistencia SMD de Tipo Chip, Película Gruesa, 1206 [Métrica 3216], 5.9 kohm, Serie ERJ8E, 200 V", Tolerance="1 %", ComponentLink1Description="Farnell Webpage", ComponentLink1URL=https://es.farnell.com/panasonic/erj8enf5901v/res-5k9-1-0-25w-1206-pel-c-gruesa/dp/2307783
R14: library part R430, "MCWR12X4300FTL -  Resistencia SMD de Tipo Chip, Película Gruesa, 1206 [Métrica 3216], 430 ohm, Serie MCWR, 200 V", Tolerance="1 %", ComponentLink1Description="Farnell Webpage", ComponentLink1URL=https://es.farnell.com/multicomp/mcwr12x4300ftl/res-430r-1-0-25w-1206-pel-c-gruesa/dp/2447518
R15: library part R75, "ERJ8ENF75R0V -  Resistencia SMD de Tipo Chip, Película Gruesa, 1206 [Métrica 3216], 75 ohm, Serie ERJ8E, 200 V", Tolerance="1 %", ComponentLink1Description="Farnell Webpage", ComponentLink1URL=https://es.farnell.com/panasonic/erj8enf75r0v/res-75r-1-0-25w-1206-pel-c-gruesa/dp/2057747
R16: library part R200, "MCWR12X2000FTL -  Resistencia SMD de Tipo Chip, Película Gruesa, 1206 [Métrica 3216], 200 ohm, Serie MCWR, 200 V", Tolerance="1 %", ComponentLink1Description="Farnell Webpage", ComponentLink1URL=https://es.farnell.com/multicomp/mcwr12x2000ftl/res-200r-1-0-25w-1206-pel-c-gruesa/dp/2447482
R17 R18: library part R220, "MCWR12X2200FTL -  Resistencia SMD de Tipo Chip, Película Gruesa, 1206 [Métrica 3216], 220 ohm, Serie MCWR, 200 V", Case Code (Imperial)=1206, Case Code (Metric)=3216, Manufacturer=Multicomp, Manufacturer Part Number=MCWR12X2200FTL, Power Rating=250mW, Resistance=220R, Supplier Part Number 1=2447486RL, Temperature Coefficient=100ppm/°C, Tolerance=1%, Voltage Rating=200V, ComponentLink1Description=http://www.farnell.com/datasheets/1849611.pdf?src-supplier=Element14, ComponentLink1URL=http://www.farnell.com/datasheets/1849611.pdf?src-supplier=Element14, Composition="Thick Film", Mount="Surface Mount", Packaging="Tape and Reel", Pricing 1="150=0.01, 500=0.0071, 1000=0.0055, 2500=0.0045 (EUR)", REACH SVHC="No SVHC", Stock 1=0, Supplier 1=Farnell, Voltage Rating (DC)=200V
RF1 RF2 RF3 RF4 RF5: "85305-0232 -  Conector de RF / Coaxial, Coaxial SMP, Macho Recto, Montaje Superficial Vertical, 50 ohm, Latón", PartNumber=19S101-40ML5, ComponentLink1Description="Farnell Webpage", ComponentLink1URL=https://es.farnell.com/molex/85305-0232/coax-rf-smp-macho-50-ohm-pcb/dp/2396235, ComponentLink2Description=Datasheet, ComponentLink2URL=http://rosenberger.de/ok/images/documents/db/19S101-40ML5.pdf, ComponentLink3Description="Package Specification", ComponentLink3URL=http://rosenberger.de/ok/images/documents/db/19S101-40ML5.pdf, ComponentLink4Description="Series Overview / Design Note", ComponentLink4URL=http://rosenberger.de/ok/images/documents/spez/19.pdf, DatasheetVersion=a00, Design Note="Footprint in library is a generic example - only application specific footprint delivers High Performance", Detention force="limited detent", Lock-in Range=small, Mounting Technology="Surface Mount", PackageDescription="SMP Straight Plug Limited Detent, Small, 6 x 5 x 4.1 mm", PackageReference=19S101-40ML5, PackageVersion=a00
U1 U3: "DAC08ESZ -  Convertidor de Señal Digital a Analógica, 8 bit, ± 4.5V a ± 18V, NSOIC, 16 Pines", Built_By=EMA_UL_Team, ComponentLink1Description="Farnell Webpage", ComponentLink1URL=https://es.farnell.com/analog-devices/dac08esz/conv-dac-8-bits-nsoic-16/dp/2462586?ost=DAC08ESZ&ddkey=https%3Aes-ES%2FElement14_Spain%2Fsearch, Copyright="Copyright (C) 2018 Accelerated Designs. All rights reserved", Manufacturer_Part_Number=DAC08ESZ, RefDes=RefDes, Type=DEV, Vendor="Analog Devices Inc"
U2 U4: "AD8028ARZ -  Amplificador Operacional, Doble, 2 Amplificadores, 190 MHz, 100 V/µs, 2.7V a 12V, SOIC, 8 Pines", Built_By=EMA_UL_Team, ComponentLink1Description="Farnell Webpage", ComponentLink1URL=https://es.farnell.com/analog-devices/ad8028arz/amp-de-baja-distorsi-n-rri-o-smd/dp/1581947?ost=AD8028ARZ&ddkey=https%3Aes-ES%2FElement14_Spain%2Fsearch, Copyright="Copyright (C) 2018 Accelerated Designs. All rights reserved", Manufacturer_Part_Number=AD8028ARZ, RefDes=RefDes, Type=DEV, Vendor="Analog Devices Inc"
U5 U6 U7: "1-Channel Single ADC Semiflash 2Msps 8-bit Parallel 20-Pin SOIC W Tube", Built_By=EMA_UL_Team, C="Copyright (C) 2015 Accelerated Designs. All rights reserved", ComponentLink1Description="Arrow Webpage", ComponentLink1URL=https://www.arrow.com/es-mx/products/ad7822br/analog-devices, ComponentLink2Description="RS webpage (Different Footprint but equivalent functionality)", ComponentLink2URL=https://es.rs-online.com/web/p/convertidores-analogico-a-digital-para-uso-general/5384656/, Manufacturer_Part_Number=AD7822BR, RefDes=RefDes, Type=DEV, Vendor="Analog Devices Inc"
U8: "MIC29300-3.3WU -  Regulador de Tensión Fija LDO, 2.5 V a 26 V, Caída de 370 mV, 3.3 Vout, 3 Aout, TO-263-3", ComponentLink1Description="Farnell Webpage", ComponentLink1URL=https://es.farnell.com/microchip/mic29300-3-3wu/ic-reg-ldo-3a-3-3v/dp/2510017?st=MIC29300-3.3WU
U9: "MIC29152WU -  Regulador de Tensión LDO, Ajustable, Entrada 2V a 26V, Caída 350mV, Salida 1.27V-25V/1.5A, TO-263-5", Manufacturer_Part_Number=MIC29152BU, Built_By=EMA_UL_Team, ComponentLink1Description="Farnell WebPage", ComponentLink1URL=https://es.farnell.com/microchip/mic29152wu/ic-v-reg-ldo-1-5a-adj-smd-29152/dp/2510008?scope=partnumberlookahead&ost=MIC29152WU&searchref=searchlookahead&exaMfpn=true&ddkey=https%3Aes-ES%2FElement14_Spain%2Fw%2Fsearch, Copyright="Copyright (C) 2018 Accelerated Designs. All rights reserved", RefDes=RefDes, Type=DEV, Vendor=Micrel
U10: "AD780CRZ -  Referencia de Tensión, Alta Precisión, Serie - Programable, Serie AD780, 2.5V, 3V, NSOIC-8", ComponentLink1Description="Farnell Webpage", ComponentLink1URL=https://es.farnell.com/analog-devices/ad780arz/ref-de-tensi-n-serie-2-5v-3v-nsoic/dp/2112642?scope=partnumberlookahead&ost=AD780ARZ&searchref=searchlookahead&exaMfpn=true&ddkey=https%3Aes-ES%2FElement14_Spain%2Fw%2Fsearch, ComponentLink2Description="Farnell Webpage (Compatible Chip)", ComponentLink2URL=https://es.farnell.com/analog-devices/ad780crz/ref-de-tensi-n-serie-2-5v-3v-nsoic/dp/2461818?st=AD780
U11: "IA1205S -  Convertidor DC/DC Aislado de Montaje en Placa, Orificio Pasante, 1W, 5V, 100mA, -5V, 100mA", Manufacturer_Part_Number=MIC29152BU, Built_By=EMA_UL_Team, ComponentLink1Description="Farnell WebPage", ComponentLink1URL=https://es.farnell.com/xp-power/ia1205s/converter-dc-dc-1w-5v/dp/8727546, Copyright="Copyright (C) 2018 Accelerated Designs. All rights reserved", RefDes=RefDes, Type=DEV, Vendor=Micrel

## Via types
v1: diameter 0.6, hole 0.3, L1 to L4, 103 vias

## Nets (pads, with @x,y where several pads share a name; then routed paths per layer and width w, separated by ;. In a path a pad name is that pad's centre, name@x,y a point inside that pad or via, vN(x,y) a via of type N, cw(c..) or ccw(c..) an arc to the next point about the centre after c; other vN are vias at no path point)
GND: C1.2 C2.2 C4.2 C5.2 C6.2 C7.2 C9.2 C10.2 C11.2 C12.2 C13.2 C14.2 C16.2 C17.2 C18.2 C19.2 C20.2 C21.2 C22.2 C23.2 C24.2 C25.2 C26.2 C27.2 C28.2 C29.2 C30.2 C31.2 C32.2 C33.2 C34.2 C35.2 C36.2 C37.2 C38.2 C39.2 C40.2 C41.2 C42.2 C43.2 C44.2 C45.2 C46.2 C47.2 J1.12 J1.30 J2.12 J2.30 J3.6 J7.1 R1.1 R7.1 R14.2 R16.2 R17.2 R18.1 RF1.MP RF2.MP RF3.MP RF4.MP RF5.MP U1.5 U1.6 U2.3 U3.5 U3.6 U4.3 U4.4 U4.5 U5.5 U5.7 U5.15 U6.5 U6.7 U6.15 U7.5 U7.7 U7.15 U8.2 U9.3 U10.4 U11.2 U11.4 | length 203.2
  L1 w0.3: v1(25.365,-2.8) U5.5@25.365,-0.678 ; U7.5@25.365,21.8 25.4,21.835 25.3,21.935 25.365,22 v1(25.365,23.1) ; U6.5@25.365,42.9 25.4,42.935 v1(25.4,45) ; C25.2@25.679,17.1 C24.2@25.679,14.5 25.679,12.656 26.9,11.435 v1(26.9,10.5) 26.9,10.113 26.6,9.813 U5.15@26.635,9.778 ; C33.2@25.679,33.7 25.679,33.421 26.8,32.3 v1(26.8,32.2) 26.8,30.422 U7.15@26.635,30.257 ; C33.2@25.679,34.4 25.679,37 C35.2@25.679,38.9 C35.2@25.679,39.6 ; C30.2@25.679,60.7 C29.2@25.679,58.1 C28.2@25.679,55.5 26.7,54.479 v1(26.7,54) 26.7,52.322 26.8,52.222 U6.15@26.635,52.057 ; U5.7@27.905,-0.678 27.905,-1.651 29.614,-3.36 v1(32.3,-3.36) ; U7.7@27.905,21.1 27.905,20.127 28.684,19.348 28.892,19.348 30.09,18.15 32.45,18.15 v1(33,18.7) ; U6.7@27.905,42.9 27.905,41.927 29.53,40.302 30.083,40.302 31.984,38.4 v1(34.1,38.4) ; C21.2@34.121,14.5 34.121,13.8 34.721,13.2 C22.2@34.721,11.9 v1(34.721,10.294) ; C31.2@34.121,36.9 C31.2@34.121,36.2 34.121,34.9 C32.2@34.721,34.3 ; C26.2@34.121,58 34.121,56 C27.2@34.721,55.4 34.7,55.379 v1(34.7,53.7) ; C32.2@34.721,33.6 34.5,33.379 34.8,33.079 v1(34.8,31.9) ; v1(37.3,47.585) 37.3,46.8 C14.2@38.3,45.8 ; C13.2@39.6,52.221 v1(39.6,53.7) ; U4.4@41.656,32.895 41.676,32.875 v1(43.5,32.875) ; U4.3@41.656,34.165 v1(43.5,34.165) ; C12.2@42.2,52.221 42.3,52.321 v1(42.3,53.7) ; v1(42.5,38.8) C18.2@43.9,38.8 ; v1(42.5,41.4) C19.2@43.9,41.4 ; v1(44.7,59.9) 45.7,59.9 C9.2@46.6,59 ; U4.5@46.48,32.895 46.5,32.875 v1(46.5,31.9) ; U2.3@50.412,51.535 51.835,51.535 v1(52.3,52) ; v1(50.8,45.6) 50.8,42.568 C20.2@50.868,42.5 ; v1(51.7,58.7) 53.2,58.7 53.121,58.621 C10.2@53.121,58.2 ; v1(51.8,55.2) 52.721,55.2 C11.2@53.121,55.6 ; R1.1@56.161,21.1 v1(57.5,21.1) ; v1(56.161,43.239) 56.167,43.233 R7.1@56.167,41.655 ; C4.2@56.488,16.221 C5.2@59.1,16.221 64.479,16.221 v1(64.5,16.2) 62.523,16.2 U1.5@62.488,16.165 ; C16.2@56.488,36.776 C17.2@59.088,36.776 59.088,36.547 v1(60.2,35.435) ; v1(60.6,14.9) 62.483,14.9 U1.6@62.488,14.895 ; U3.5@62.396,36.8 61.565,36.8 v1(60.2,35.435) ; U3.6@62.476,35.45 62.461,35.435 v1(60.2,35.435) ; C2.2@64.621,24 C1.2@64.621,26.6 64.621,26.921 v1(65.5,27.8) ; v1(65.4,42.8) 65.454,42.8 C7.2@67.009,44.355 C6.2@67.009,46.955
  L4 w0.3: v1(32.3,-3.36) 32.3,18 v1(33,18.7) 33.156,18.856 33.156,28.256 34.147,29.247 34.6,29.247 34.1,29.747 v1(34.1,38.4) ; U8.2@34.6,29.234 v1(34.6,29.182) 34.6,25.22 C41.2@34.9,24.92 34.9,21.579 R14.2@34.621,21.3 ; C39.2@37.279,23.6 v1(38.6,23.6) ; C40.2@37.279,26.19 v1(38.6,26.19) ; R16.2@46.1,44.193 46.2,44.293 v1(46.2,45.5) ; U9.3@51.4,42.766 51.9,43.266 v1(51.9,45.6) ; v1(51.7,36.3) 52.9,36.3 C42.2@53,36.4 ; C47.2@56.321,23.457 56.321,24.1 v1(57.6,24.1) ; C46.2@56.364,26.8 v1(57.6,26.8) ; C38.2@57.7,46 58.1,45.6 v1(58.1,44.6) ; v1(58,34.793) C36.2@58,35.9 ; v1(60.3,44.6) C37.2@60.3,45.993 ; v1(62.8,24.4) R17.2@62.8,25.7 ; R17.2@62.8,26.057 R18.1@64.558,26.057 ; C43.2@66.521,57.1 65.81,56.389 U10.4@65.81,54.8 ; v1(67.01,53.6) U10.4@65.81,54.8 ; C44.2@68.6,54.821 68.579,54.8 U10.4@65.81,54.8 ; C45.2@69.7,45.4 v1(69.7,46.955)
  other v1: 35.1,-2.982 39.1,-2.982 43.458,-2.982 47.458,-2.982 51.827,-2.982 55.827,-2.982 35.1,1 39.1,1 43.458,1 47.458,1 51.827,1 55.827,1 38.36,16.364 48.9,16.364 42.3,16.442 52.84,16.442 38.2,19.6 42.3,20.5 48.9,20.5 52.84,20.5 34.6,28.1 34.6,30.264 33.1,43.2 36.6,43.2 33.1,46.105 36.6,46.105 48.95,53.9 51.4,53.9 53.65,53.9 51.4,56.4 51.4,57.6
Iout_DAC_1: R9.1 U1.8 U4.2 | length 43.7
  L1 w0.3: R9.1@37.668,34.379 37.668,33.732 39.8,31.6 43.7,31.6 46.1,29.2 v1(46.1,26.921) ; R9.1@38.168,34.379 39.079,34.379 40.2,35.5 41.591,35.5 U4.2@41.656,35.435 ; v1(61,11.3) 62.055,12.355 U1.8@62.488,12.355
  L4 w0.3: v1(46.1,26.921) 46.1,22.08 57.289,10.89 59.303,10.89 59.713,11.3 v1(61,11.3)
Iout_DAC_2: R10.1 U3.8 U4.6 | length 19.8
  L1 w0.3: U4.6@45.98,34.165 U4.6@46.48,34.165 48.382,34.165 49.652,32.895 50.039,33.282 v1(50.039,34.4) ; v1(61.089,31.811) 62.188,32.91 U3.8@62.476,32.91
  L4 w0.3: v1(50.039,34.4) 52.372,32.068 60.732,32.068 60.989,31.811 v1(61.089,31.811)
NetC3_1: C3.1 U1.4 | length 14.9
  L1 w0.3: v1(57.8,11.7) 58.5,11.7 59.5,10.7 C3.1@59.421,10.7 ; U1.4@62.488,17.435 v1(64.5,17.435)
  L4 w0.3: v1(57.8,11.7) 57.8,14.462 60.773,17.435 v1(64.5,17.435)
NetC15_1: C15.1 U3.4 | length 13.7
  L1 w0.3: C15.1@59.409,31.255 59.714,30.95 63.574,30.95 v1(64.2,31.576) ; U3.4@62.476,37.99 62.486,38 62.586,37.9 62.786,38.1 62.986,37.9 63.076,37.99 64.2,37.99
  L4 w0.3: v1(64.2,31.576) 64.2,37.7 v1(64.5,38)
NetC21_1: C21.1 U5.13 | length 5.7
  L1 w0.3: U5.13@29.175,9.778 30.002,10.605 30.002,13.942 30.662,14.602 C21.1@30.879,14.602
NetC22_1: C22.1 U5.12 | length 2.5
  L1 w0.3: U5.12@30.445,9.778 30.602,9.935 30.602,11.023 C22.1@31.479,11.9
NetC26_1: C26.1 U6.13 | length 6.6
  L1 w0.3: U6.13@29.175,52.057 29.175,53.535 30.002,54.362 30.002,56.142 30.879,57.019 C26.1@30.879,58
NetC27_1: C27.1 U6.12 | length 3.8
  L1 w0.3: U6.12@30.445,52.057 30.602,52.214 30.602,54.523 C27.1@31.479,55.4
NetC31_1: C31.1 U7.13 | length 6.6
  L1 w0.3: U7.13@29.175,30.957 29.175,31.42 30.002,32.247 30.002,35.862 30.879,36.739 C31.1@30.879,36.9
NetC32_1: C32.1 U7.12 | length 4.5
  L1 w0.3: U7.12@30.445,30.257 30.602,30.414 30.602,32.723 C32.1@31.479,33.6 C32.1@31.479,34.3
NetC44_1: C44.1 U10.3 | length 6.1
  L4 w0.3: U10.3@64.54,54.8 64.54,53.537 66.498,51.579 C44.1@68.6,51.579
NetR1_2: R1.2 U1.2 | length 3.6
  L1 w0.3: R1.2@59.403,21.1 60.528,19.975 U1.2@62.488,19.975
NetR2_1: R2.1 U5.4 | length 4.2
  L1 w0.3: R2.1@23.221,-4.5 24.095,-3.626 U5.4@24.095,-0.678
NetR3_2: R3.2 U1.3 | length 3.2
  L1 w0.3: R3.2@59.403,18.5 59.608,18.705 U1.3@62.488,18.705
NetR4_2: R4.2 R6.1 | length 2.6
  L1 w0.3: R4.2@59.321,48.1 R6.1@59.321,50.7
NetR5_1: R5.1 R6.2 U2.2 | length 6.1
  L1 w0.3: U2.2@50.412,50.265 52.2,50.265 52.956,51.021 R5.1@53.8,51.021 55.758,51.021 R6.2@56.079,50.7
NetR7_2: R7.2 U3.2 | length 3.5
  L1 w0.3: R7.2@59.409,41.655 60.534,40.53 U3.2@62.476,40.53
NetR8_2: R8.2 U3.3 | length 3.2
  L1 w0.3: R8.2@59.409,39.055 59.614,39.26 U3.3@62.476,39.26
NetR11_1: R11.1 U6.4 | length 4.3
  L1 w0.3: R11.1@23.221,39 23.4,39.179 23.4,40.6 24.095,41.295 U6.4@24.095,42.9
NetR12_1: R12.1 U7.4 | length 4.3
  L1 w0.3: R12.1@23.221,17.2 23.221,18.616 24.095,19.49 U7.4@24.095,21.1
NetR13_2: R13.2 R15.1 | length 2.6
  L4 w0.3: R15.1@47.1,35.755 47.105,35.75 R13.2@49.7,35.75
NetR15_2: R15.2 R16.1 U9.5 | length 5
  L4 w0.3: R15.2@47.1,38.998 47.1,39.95 R16.1@46.1,40.95 46.18,40.95 U9.5@47.996,42.766
o_CONVST_ADC_1: J2.1 R2.2 | length 19
  L1 w0.262: J2.1@11.34,1.54 12.6,0.28 12.741,0.138 13.024,0.138 13.316,0.43 13.599,0.43 13.882,0.147 13.882,-0.135 13.449,-0.569 12.984,-1.033 12.984,-1.316 13.267,-1.599 13.549,-1.599 14.014,-1.134 14.447,-0.701 14.73,-0.701 15.013,-0.984 15.013,-1.267 14.58,-1.7 14.115,-2.165 14.115,-2.448 14.398,-2.731 14.681,-2.731 15.146,-2.266 15.384,-2.027 15.667,-2.027 15.95,-2.31 15.95,-2.593 15.711,-2.831 15.246,-3.296 15.246,-3.579 15.529,-3.862 15.812,-3.862 16.136,-3.538 16.418,-3.538 16.99,-4.11 17.38,-4.5 R2.2@19.979,-4.5
o_CONVST_ADC_2: J2.13 R12.2 | length 22.7
  L1 w0.262: J2.13@11.34,16.78 11.955,16.165 12.717,16.165 12.907,16.165 13.098,16.355 13.098,18.424 13.288,18.614 13.669,18.614 13.86,18.424 13.86,16.355 14.05,16.165 14.431,16.165 14.622,16.355 14.622,18.424 14.812,18.614 15.193,18.614 15.384,18.424 15.384,16.355 15.574,16.165 15.955,16.165 16.146,16.355 16.146,18.424 16.336,18.614 16.717,18.614 16.908,18.424 16.908,16.355 17.098,16.165 17.416,16.165 18.944,16.165 R12.2@19.979,17.2
o_CONVST_ADC_3: J2.23 R11.2 | length 25
  L1 w0.262: J2.23@11.34,29.48 12.946,29.48 13.215,29.749 13.619,30.154 13.889,30.154 14.687,29.355 14.956,29.355 15.226,29.625 15.226,29.894 14.293,30.827 14.092,31.028 14.092,31.297 14.361,31.567 14.631,31.567 14.832,31.366 15.765,30.433 16.034,30.433 16.303,30.702 16.303,30.972 15.37,31.905 15.17,32.105 15.17,32.375 15.439,32.644 15.708,32.644 15.774,32.578 16.044,32.578 16.448,32.982 16.466,33 16.53,33.065 16.53,35.551 16.8,35.821 17.204,36.225 17.473,36.225 17.822,35.876 18.091,35.876 18.36,36.146 18.36,36.415 17.877,36.898 17.46,37.316 17.46,37.585 17.729,37.854 17.999,37.854 18.416,37.437 18.899,36.954 19.169,36.954 19.438,37.223 19.438,37.493 19.09,37.841 19.09,38.111 R11.2@19.979,39
o_DB0_ADC_1: J2.4 U5.3 | length 19
  L1 w0.262: J2.4@8.8,4.08 10.09,2.79 12.326,2.79 15.358,-0.242 16.025,-0.909 16.025,-1.192 16.007,-1.209 16.007,-1.492 16.29,-1.775 16.573,-1.775 16.591,-1.757 16.874,-1.757 17.298,-2.182 17.864,-2.747 18.146,-3.03 21.652,-3.03 22.825,-1.857 U5.3@22.825,-0.678
o_DB0_ADC_2: J2.16 U7.3 | length 22.7
  L1 w0.262: J2.16@8.8,19.32 7.833,19.32 7.5,18.987 7.5,18.413 7.824,18.089 11.969,18.089 13.056,19.176 17,19.176 17.495,18.681 17.495,17.182 17.8,16.877 18.6,16.877 18.917,17.194 18.917,18.33 19.392,18.805 21.476,18.805 22.825,20.154 U7.3@22.825,21.1
o_DB0_ADC_3: J2.26 U6.3 | length 22.1
  L1 w0.262: J2.26@8.8,32.02 10.05,30.77 12.77,30.77 15.8,33.8 15.8,37.04 19.209,40.449 21.5,40.449 22.825,41.774 U6.3@22.825,42.9
o_DB1_ADC_1: J2.3 U5.2 | length 19.1
  L1 w0.262: J2.3@11.34,4.08 11.885,4.08 14.282,1.682 14.424,1.541 14.707,1.541 15.458,2.293 15.741,2.293 16.024,2.01 16.024,1.727 15.272,0.975 15.272,0.692 15.555,0.41 15.838,0.41 16.59,1.161 16.873,1.161 17.156,0.879 17.156,0.596 16.404,-0.156 16.404,-0.439 16.828,-0.863 18.082,-2.118 18.395,-2.43 20.776,-2.43 21.555,-1.651 U5.2@21.555,-0.678
o_DB1_ADC_2: J2.15 U7.2 | length 13.3
  L1 w0.262: J2.15@11.34,19.32 12.068,20.048 12.449,20.048 13.091,20.048 13.211,19.929 13.401,19.738 13.782,19.738 13.973,19.929 14.092,20.048 14.615,20.048 14.735,19.929 14.925,19.738 15.306,19.738 15.497,19.929 15.616,20.048 16.259,20.048 16.91,20.048 17.4,20.538 19.226,20.538 19.549,20.215 19.549,19.62 19.802,19.367 20.768,19.367 21.555,20.154 U7.2@21.555,21.1
o_DB1_ADC_3: J2.25 U6.2 | length 18.5
  L1 w0.262: J2.25@11.34,32.02 12.547,32.02 12.775,32.248 13.179,32.652 13.449,32.652 13.518,32.583 13.788,32.583 14.057,32.852 14.057,33.121 13.853,33.326 13.715,33.464 13.715,33.733 13.984,34.002 14.254,34.002 14.257,33.999 14.526,33.999 14.931,34.403 15.2,34.673 15.2,37.1 15.2,37.288 15.558,37.646 16.096,38.185 16.511,38.6 16.511,38.847 16.511,39.117 16.781,39.386 17.05,39.386 17.298,39.386 17.589,39.677 17.589,39.925 17.589,40.194 17.858,40.464 18.128,40.464 18.375,40.464 18.79,40.879 19.06,41.148 20.776,41.148 21.555,41.927 U6.2@21.555,42.9
o_DB1_DAC_1: J1.39 U1.9 | length 20
  L1 w0.262: U1.9@67.312,12.355 68.399,11.268 68.399,10.177 68.682,9.894 69.106,9.47 69.106,9.187 68.572,8.653 68.572,8.37 68.854,8.087 69.137,8.087 69.672,8.621 69.954,8.621 70.237,8.339 70.237,8.056 69.703,7.521 69.703,7.239 69.986,6.956 70.269,6.956 70.803,7.49 71.086,7.49 73.3,5.276 76.352,2.224 77.814,2.224 J1.39@78.504,1.534